# EAGLE board off_timer_eeprom (EAGLE 9.6.2)
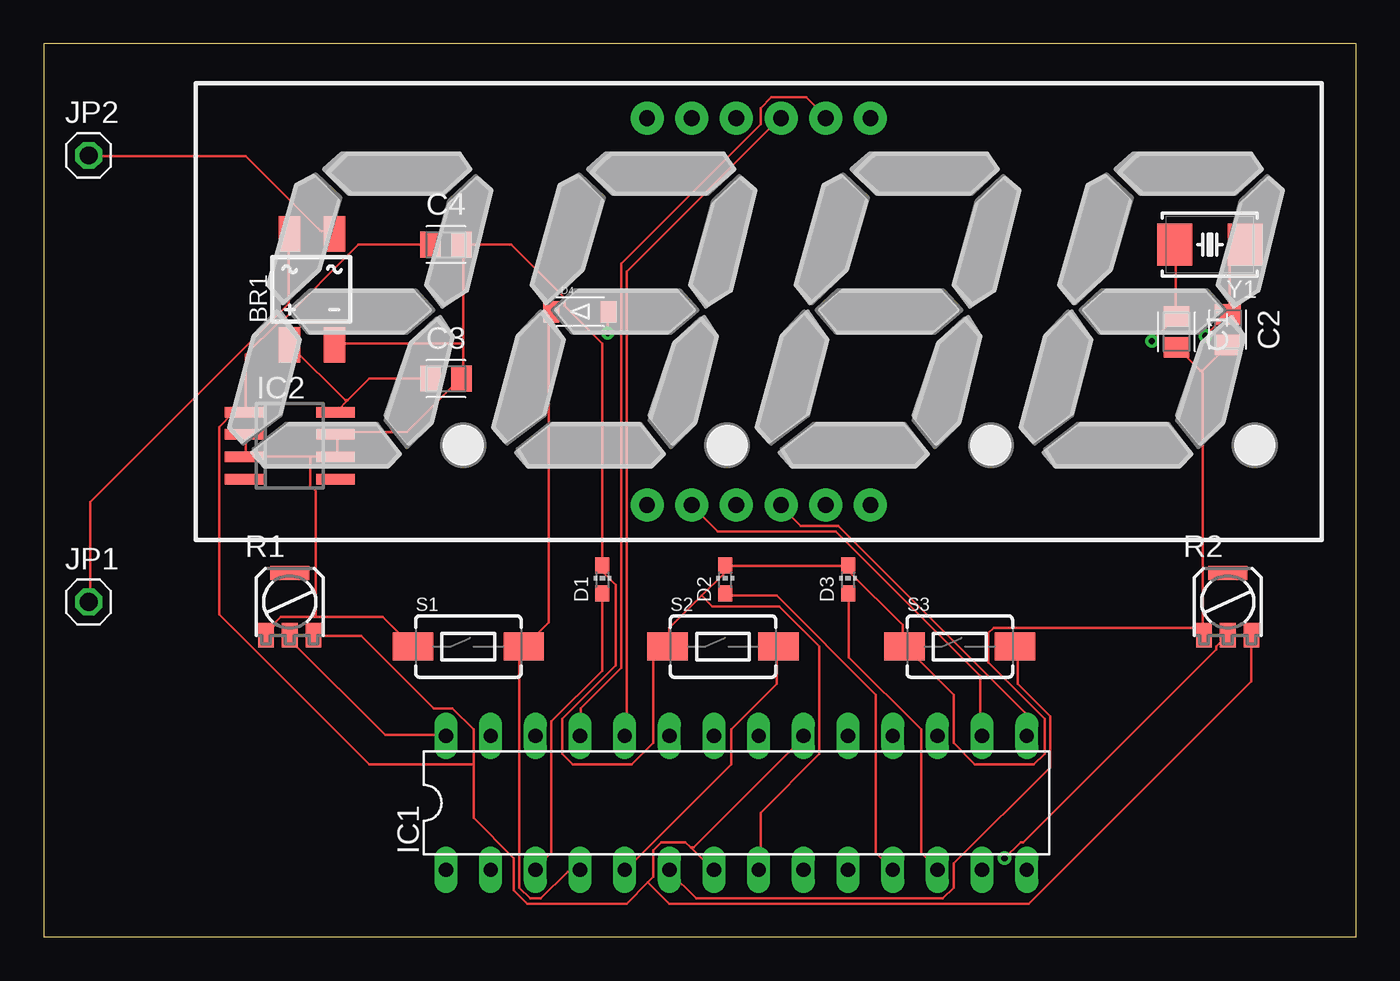
[diagram p0: board, top side]
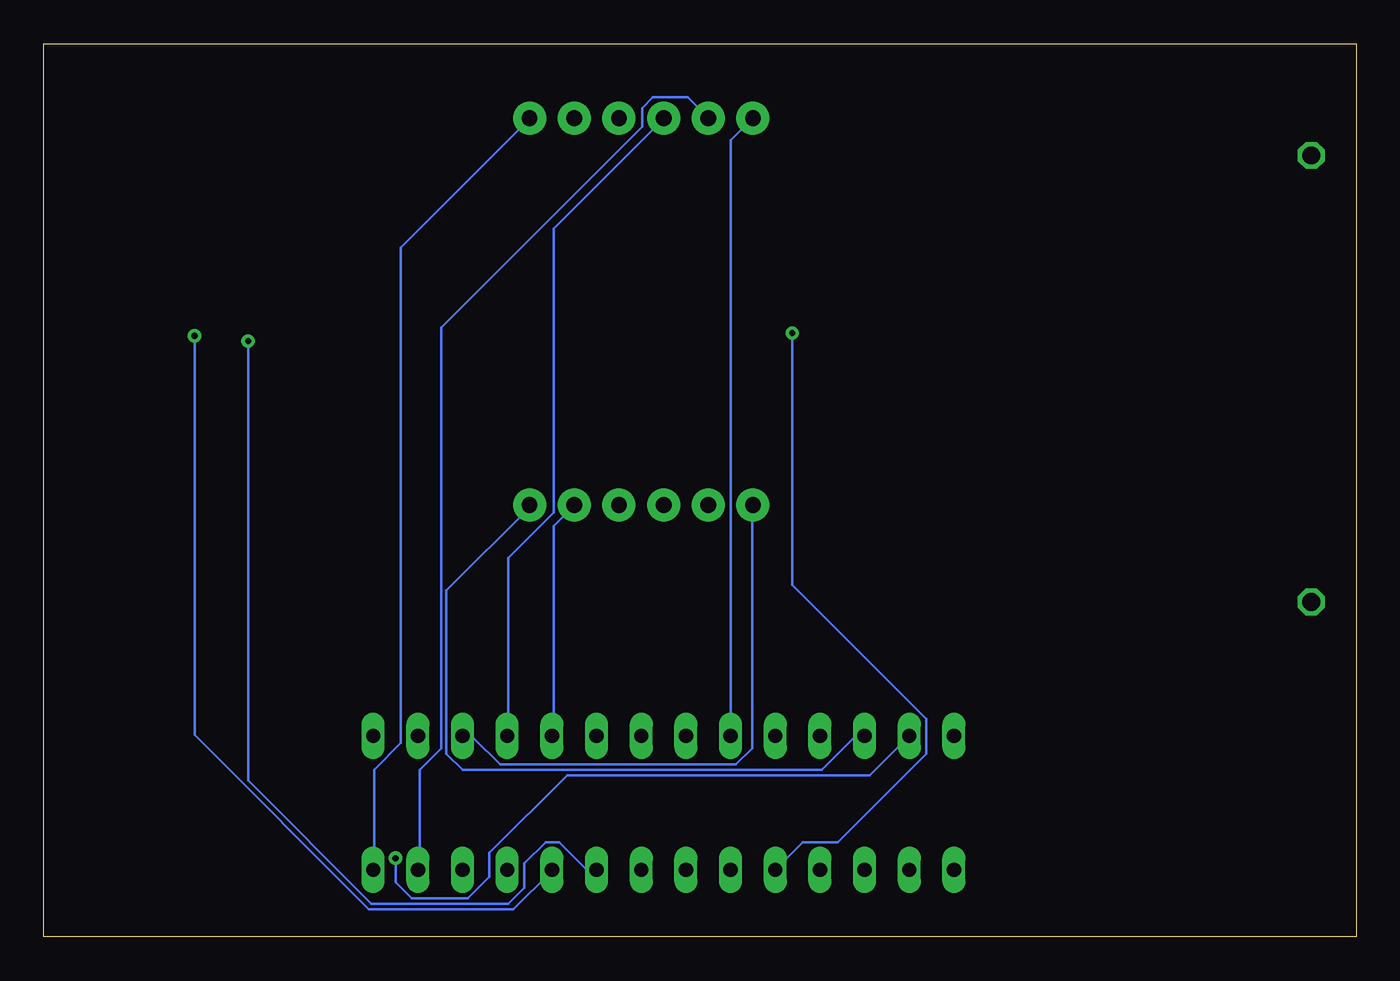
[diagram p1: board, bottom side, seen from below]

Size 74.6 x 50.79 mm. Coordinates in mm from the lower left corner, seen from the top.
Outline: 0,0 74.6,0 74.6,50.79 0,50.79 0,0
Copper layers (1*16): Top 0.035mm / dielectric 1.5mm / Bottom 0.035mm
Design rules "default": minimum track width 6mil, minimum drill 0.35mm, track to track 6mil, track to pad 6mil, pad to pad 6mil, via to via 6mil, smd to smd 6mil, copper to edge 40mil, drill to drill 6mil, minimum pad ring 10mil, minimum via ring 8mil, stop-mask expansion 4mil, vias tented up to drill 0mil, thermal gap 10mil

## Footprints (pad centres in the part's own frame; a part is rotated, then mirrored left to right if it is on the bottom)
RECTIFIER_TO-269AA = smd 1.2 x 2: + -1.28,-3.155; - 1.28,-3.155; AC1 -1.28,3.155; AC2 1.28,3.155
CAPC2012X110 = smd 1.165 x 1.465: 1 -0.875,0; 2 0.875,0
LED_CHIP-LED0603MP = smd 0.8 x 0.9: A 0,-0.794; C 0,0.794
DIODE_SOD-123FL = smd 0.91 x 1.22: A 1.637,0; C -1.637,0
7-SEGMENT-4DIGIT-20MM = drill 0.9 pad 1.88: 1 -6.35,-10.998; 2 -3.81,-10.998; 3 -1.27,-10.998; 4 1.27,-10.998; 5 3.81,-10.998; 6 6.35,-10.998; 7 6.35,10.998; 8 3.81,10.998; 9 1.27,10.998; 10 -1.27,10.998; 11 -3.81,10.998; 12 -6.35,10.998
DIL28-3 = drill 0.813 long: 1 -16.51,-3.81; 2 -13.97,-3.81; 3 -11.43,-3.81; 4 -8.89,-3.81; 5 -6.35,-3.81; 6 -3.81,-3.81; 7 -1.27,-3.81; 8 1.27,-3.81; 9 3.81,-3.81; 10 6.35,-3.81; 11 8.89,-3.81; 12 11.43,-3.81; 13 13.97,-3.81; 14 16.51,-3.81; 15 16.51,3.81; 16 13.97,3.81; 17 11.43,3.81; 18 8.89,3.81; 19 6.35,3.81; 20 3.81,3.81; 21 1.27,3.81; 22 -1.27,3.81; 23 -3.81,3.81; 24 -6.35,3.81; 25 -8.89,3.81; 26 -11.43,3.81; 27 -13.97,3.81; 28 -16.51,3.81
SO08 = smd 0.6 x 2.2: 1 -1.905,-2.6; 2 -0.635,-2.6; 3 0.635,-2.6; 4 1.905,-2.6; 5 1.905,2.6; 6 0.635,2.6; 7 -0.635,2.6; 8 -1.905,2.6
1X01 = drill 1.016 octagon: 1 0,0
PC25 = smd 2.2 x 0.8: 4 0,1.65 | smd 0.9 x 1.4: A -1.35,-1.9; E 1.35,-1.9; S 0,-1.9
TACTILE-SWITCH-1101NE = smd 2.3 x 1.6: 1 -3.15,0; 2 3.15,0
CRYSTAL_2-SMD-5X3 = smd 2 x 2.4: 1 -2,0; 2 2,0

## Placement (x,y rotation side)
BR1  RECTIFIER_CDBHD240  [RECTIFIER_TO-269AA]  15.24,36.83 0 top
C1  [CAPC2012X110]  64.39,34.42 270 top
C2  [CAPC2012X110]  67.31,34.54 270 top
C3  [CAPC2012X110]  22.86,31.75 0 top
C4  [CAPC2012X110]  22.86,39.37 0 top
D1  [LED_CHIP-LED0603MP]  31.75,20.32 0 top
D2  [LED_CHIP-LED0603MP]  38.73,20.32 0 top
D3  [LED_CHIP-LED0603MP]  45.72,20.32 0 top
D4  [DIODE_SOD-123FL]  30.48,35.56 0 top
DISP1  ATA8041AB  [7-SEGMENT-4DIGIT-20MM]  40.64,35.56 0 top
IC1  [DIL28-3]  39.37,7.62 0 top
IC2  78L05SMD  [SO08]  13.97,27.94 270 top
JP1  PINHD-1X1  [1X01]  2.54,19.05 0 top
JP2  PINHD-1X1  [1X01]  2.54,44.45 0 top
R1  [PC25]  13.97,19.05 0 top
R2  [PC25]  67.31,19.05 0 top
S1  RS032G05A3SM-SPST-MOMENTARY-SWSMD-1101NE  [TACTILE-SWITCH-1101NE]  24.13,16.51 0 top
S2  RS032G05A3SM-SPST-MOMENTARY-SWSMD-1101NE  [TACTILE-SWITCH-1101NE]  38.61,16.51 0 top
S3  RS032G05A3SM-SPST-MOMENTARY-SWSMD-1101NE  [TACTILE-SWITCH-1101NE]  52.07,16.51 0 top
Y1  CRYSTAL_NX5032GA  [CRYSTAL_2-SMD-5X3]  66.29,39.37 180 top

## Library data of the parts
BR1 D1-D3 Y1 = 52101-101-REV-A_v16
C1-C4 = Capacitor; CATEGORY: Capacitor
D4 = BeagleBone_Blue_R3
DISP1 = SparkFun-LED; PROD_ID: COMP-11446
IC1 = ic-package
IC2 = linear
JP1 JP2 = Connector; CATEGORY: CONNECTOR; SUB-CATEGORY: PIN-HEADER
R1 R2 = pot-vitrohm; MF: CLAROSTAT; MPN: 308NPC25KS; OC_FARNELL: 1440998; OC_NEWARK: 03F7518
S1-S3 = BeagleBone_Blue_R3; PROD_ID: SWCH-00815

## Nets
N$1: IC1.6 S3.2
N$2: C1.1 IC1.9 Y1.2
N$3: C2.1 IC1.10 Y1.1
N$4: C4.1 IC1.7 IC1.20 IC2.1 R1.E R2.E
N$5: BR1.- C1.2 C2.2 C3.2 C4.2 D1.C D2.C D3.C IC1.8 IC2.2 IC2.3 IC2.6 IC2.7 R1.A R2.A S1.1 S2.1 S3.1
N$6: D1.A IC1.3
N$7: BR1.+ C3.1 IC2.8
N$8: D4.A IC1.5 S2.2
N$9: D4.C IC1.4 S1.2
N$10: D3.A IC1.12
N$11: D2.A IC1.11
N$12: DISP1.6 IC1.26
N$13: DISP1.8 IC1.25
N$14: IC1.28 R1.S
N$15: IC1.27 R2.S
N$16: DISP1.9 IC1.24
N$17: DISP1.12 IC1.23
N$18: DISP1.5 IC1.19
N$19: DISP1.10 IC1.18
N$20: DISP1.4 IC1.15
N$21: DISP1.1 IC1.17
N$22: DISP1.2 IC1.16
N$23: DISP1.7 IC1.14
N$24: DISP1.11 IC1.13
N$26: BR1.AC1 JP1.1
N$27: BR1.AC2 JP2.1

## Tracks (layer width: path | path; a pad name or v marks a point on that pad's centre or on a via)
N$1
  Top 0.152: S3.2 55.37,16.51 55.37,14.38 57.2,12.55 57.2,9.65 51.71,4.17 51.71,2.79 51.1,2.18 37.08,2.18 35.56,3.71 IC1.6
N$2  (via drill 0.35)
  Top 0.152: Y1.2 64.36,39.37 64.36,35.41 C1.1 64.36,35.26 v62.99,33.88
  Bottom 0.152: v62.99,33.88 62.99,8.89 55.98,1.88 48.21,1.88 47.3,2.79 47.3,4.17 46.08,5.38 45.31,5.38 43.79,3.86 43.18,3.86 IC1.9
N$3  (via drill 0.35)
  Top 0.152: Y1.1 68.17,39.37 67.41,38.61 67.41,35.56 C2.1 67.26,35.41 v66.04,34.19
  Bottom 0.152: v66.04,34.19 66.04,11.48 56.13,1.57 47.9,1.57 45.77,3.71 IC1.10
N$4
  Top 0.152: C4.1 17.88,39.37 13.46,34.95 13.31,34.95 11.48,33.12 11.48,29.92 IC2.1 11.33,29.77 10.72,29.77 9.96,29.01 9.96,18.34 18.49,9.8 24.44,9.8 | 24.44,9.8 24.44,6.76 26.72,4.47 26.72,2.64 27.48,1.88 33.12,1.88 34.34,3.1 | 24.44,9.8 24.44,11.79 23.22,13.01 22.15,13.01 18.03,17.12 15.44,17.12 R1.E | 34.34,3.1 34.65,3.4 34.65,4.93 35.1,5.38 36.47,5.38 36.78,5.08 | 36.78,5.08 38,3.86 IC1.7 | 34.34,3.1 35.56,1.88 55.98,1.88 68.63,14.53 68.63,17.12 R2.E | 36.78,5.08 36.93,5.08 43.18,11.33 IC1.20
N$5
  Top 0.152: 15.44,18.19 19.25,18.19 20.93,16.51 S1.1 | 15.44,18.19 13.46,18.19 13.16,17.88 13.16,17.73 12.7,17.27 R1.A | 11.48,27.33 11.48,28.55 IC2.2 | 15.14,27.33 16.51,27.33 IC2.6 16.66,27.33 16.66,28.55 IC2.7 16.66,28.7 20.62,28.7 23.67,31.75 C3.2 23.83,31.75 23.83,33.73 | 15.14,27.33 11.48,27.33 | 11.48,27.33 IC2.3 | 23.83,39.37 26.57,39.37 29.62,36.32 29.62,35.87 31.75,33.73 D1.C 31.75,20.78 32.51,20.02 32.51,15.44 29.46,12.39 29.46,10.41 30.07,9.8 33.43,9.8 34.65,11.02 34.65,15.75 35.41,16.51 S2.1 35.56,16.51 35.56,17.58 37.39,19.41 | 23.83,39.37 23.83,33.73 | 23.83,39.37 C4.2 | 23.83,33.73 16.66,33.73 BR1.- | 15.44,18.19 15.44,25.35 15.14,25.65 15.14,27.33 | 65.89,17.58 65.89,32.05 65.73,32.21 | 65.89,17.58 65.89,17.27 R2.A 65.89,17.58 | 65.73,32.21 64.52,33.43 C1.2 | 65.73,32.21 65.89,32.21 67.26,33.58 C2.2 | 37.39,19.41 38.61,20.62 38.61,21.08 D2.C 38.76,21.08 45.62,21.08 D3.C 45.77,21.08 45.77,20.78 48.82,17.73 48.82,16.51 S3.1 48.97,16.51 51.71,13.77 51.71,11.02 52.93,9.8 56.29,9.8 56.9,10.41 56.9,12.39 53.7,15.6 53.7,17.27 54,17.58 65.89,17.58 | 37.39,19.41 38,18.8 41.81,18.8 44.09,16.51 44.09,10.41 40.74,7.06 40.74,3.86 IC1.8
N$6
  Top 0.152: D1.A 31.75,15.14 28.85,12.24 28.85,4.77 27.94,3.86 IC1.3
N$7
  Top 0.152: C3.1 18.49,31.75 17.27,30.53 | 17.27,30.53 16.66,29.92 IC2.8 | 17.27,30.53 17.12,30.53 14.07,33.58 BR1.+
N$8  (via drill 0.35)
  Top 0.152: v32.05,34.34 32.05,35.56 D4.A | S2.2 41.66,16.51 41.66,14.38 39.06,11.79 39.06,9.8 33.12,3.86 IC1.5
  Bottom 0.152: v32.05,34.34 32.05,20.02 24.44,12.39 24.44,10.41 29.46,5.38 31.45,5.38 IC1.5
N$9
  Top 0.152: D4.C 28.7,35.56 28.7,17.88 27.33,16.51 S1.2 27.18,16.51 27.03,16.36 27.03,2.79 27.63,2.18 28.24,2.18 29.77,3.71 30.38,3.71 IC1.4
N$10
  Top 0.152: D3.A 45.77,19.41 45.77,15.9 49.89,11.79 49.89,4.77 50.8,3.86 IC1.12
N$11
  Top 0.152: IC1.11 47.3,4.77 47.3,13.77 41.66,19.41 38.76,19.41 D2.A
N$12
  Bottom 0.152: IC1.26 27.94,11.33 28.55,11.33 30.38,9.5 50.8,9.5 51.71,10.41 51.71,19.71 46.99,24.44 DISP1.6
N$13
  Top 0.152: IC1.25 30.53,11.48 30.53,13.01 32.82,15.29 32.82,38.3 40.74,46.23 40.74,47.14 41.35,47.75 43.33,47.75 44.4,46.68 DISP1.8
N$14
  Top 0.152: R1.S 14.07,17.12 14.07,16.81 19.41,11.48 22.76,11.48 IC1.28
N$15  (via drill 0.35)
  Top 0.152: v54.61,4.47 55.52,5.38 55.68,5.38 66.65,16.36 66.65,16.51 67.26,17.12 R2.S
  Bottom 0.152: v54.61,4.47 54.61,3.1 53.7,2.18 50.49,2.18 49.28,3.4 49.28,4.77 44.86,9.2 27.63,9.2 IC1.27
N$16
  Top 0.152: IC1.24 33.12,11.48 33.12,37.85 41.81,46.53 DISP1.9
N$17
  Bottom 0.152: IC1.23 35.56,45.31 34.34,46.53 DISP1.12
N$18
  Bottom 0.152: IC1.19 45.62,11.48 45.62,23.37 44.55,24.44 DISP1.5
N$19
  Bottom 0.152: IC1.18 48.21,11.48 48.21,21.54 45.62,24.13 45.62,40.28 39.37,46.53 DISP1.10
N$20
  Top 0.152: IC1.15 55.83,11.48 55.83,12.7 45.16,23.37 43.03,23.37 41.96,24.44 DISP1.4
N$21
  Bottom 0.152: IC1.17 50.8,11.33 50.19,11.33 48.67,9.8 35.25,9.8 34.34,10.72 34.34,24.44 DISP1.1
N$22
  Top 0.152: IC1.16 53.24,11.48 53.24,14.83 45.01,23.06 38.3,23.06 36.93,24.44 DISP1.2
N$23
  Bottom 0.152: IC1.14 55.83,3.86 55.83,9.5 54.3,11.02 54.3,39.22 46.99,46.53 DISP1.7
N$24
  Bottom 0.152: IC1.13 53.24,3.86 53.24,9.5 52.02,10.72 52.02,34.65 40.59,46.08 40.59,47.14 39.98,47.75 38,47.75 36.93,46.68 DISP1.11
N$26
  Top 0.152: BR1.AC1 13.92,39.98 13.92,36.02 2.64,24.74 2.64,19.1 JP1.1
N$27
  Top 0.152: BR1.AC2 16.51,40.13 15.75,40.13 11.48,44.4 2.64,44.4 JP2.1